# Altium PCB 检测板.PcbDoc
Units mm, origin at the board's own origin, x right, y up, seen from the top; angles counter-clockwise.
Board outline 189.99 x 7.15 mm, 2 copper layers (Top Layer, Bottom Layer); 32 components, 64 nets, 132 pads, 0 vias.
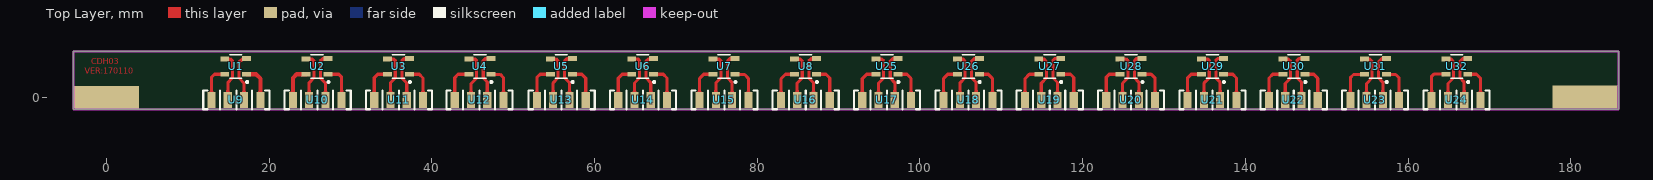
[diagram p0: Top Layer view]
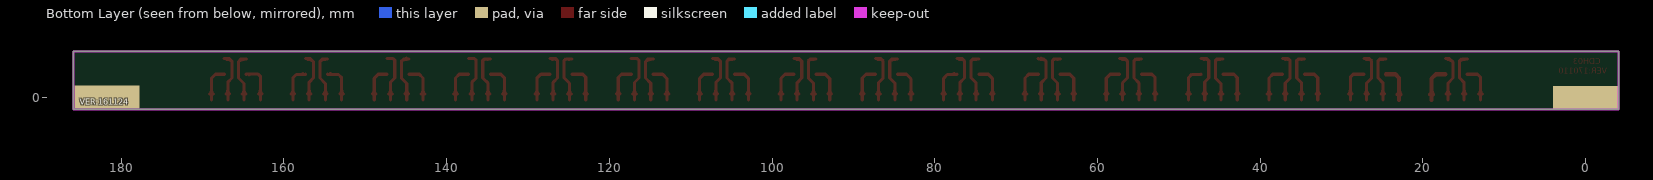
[diagram p1: Bottom Layer view, seen from below]

## Layer stack, top to bottom
Top Layer: signal copper 0.0356
Dielectric: dielectric 0.32, FR-4, Dk 4.8
Bottom Layer: signal copper 0.0356

## Board outline
-4.089,-1.473 185.896,-1.473 185.896,5.673 -4.089,5.673

## Design rules (kind name [scope] priority, off if disabled: settings)
Clearance [All] p1: gap=0.203
PolygonConnect [All] p1: connectstyle=Relief reliefconductorwidth=0.254 reliefentries=4 polygonreliefangle="90 Angle"
RoutingVias [All] p1: holewidth=0.711 width=1.27 viastyle="Through Hole" minholewidth=0.711 minwidth=1.27 maxholewidth=0.711 maxwidth=1.27
SilkscreenOverComponentPads [All] p1: minsilkscreentomaskgap=0.254
SolderMaskExpansion [All] p1: expansion=0.102
Width [All] p1: maxlimit=0.762 minlimit=0.254 preferedwidth=0.508
27 further rules are at their usual default settings.

## Components (designator, comment, footprint, x,y, rotation, side; value= is the part's Value field where it differs from the comment)
U1 "HW-101A" SOT-23-4 15.875,3.81 r270 top
U2 "HW-101A" SOT-23-4 25.883,3.81 r270 top
U3 "HW-101A" SOT-23-4 35.89,3.81 r270 top
U4 "HW-101A" SOT-23-4 45.898,3.81 r270 top
U5 "HW-101A" SOT-23-4 55.905,3.81 r270 top
U6 "HW-101A" SOT-23-4 65.913,3.81 r270 top
U7 "HW-101A" SOT-23-4 75.921,3.81 r270 top
U8 "HW-101A" SOT-23-4 85.928,3.81 r270 top
U9 "Header 4" PIN4 12.903,-0.305 r0 top
U10 "Header 4" PIN4 22.903,-0.305 r0 top
U11 "Header 4" PIN4 32.903,-0.305 r0 top
U12 "Header 4" PIN4 42.799,-0.305 r0 top
U13 "Header 4" PIN4 52.903,-0.305 r0 top
U14 "Header 4" PIN4 62.903,-0.305 r0 top
U15 "Header 4" PIN4 72.903,-0.305 r0 top
U16 "Header 4" PIN4 82.903,-0.305 r0 top
U17 "Header 4" PIN4 92.903,-0.305 r0 top
U18 "Header 4" PIN4 102.903,-0.305 r0 top
U19 "Header 4" PIN4 112.903,-0.305 r0 top
U20 "Header 4" PIN4 122.903,-0.305 r0 top
U21 "Header 4" PIN4 132.903,-0.305 r0 top
U22 "Header 4" PIN4 142.903,-0.305 r0 top
U23 "Header 4" PIN4 152.903,-0.305 r0 top
U24 "Header 4" PIN4 162.903,-0.305 r0 top
U25 "HW-101A" SOT-23-4 95.936,3.81 r270 top
U26 "HW-101A" SOT-23-4 105.943,3.81 r270 top
U27 "HW-101A" SOT-23-4 115.951,3.81 r270 top
U28 "HW-101A" SOT-23-4 125.959,3.81 r270 top
U29 "HW-101A" SOT-23-4 135.966,3.81 r270 top
U30 "HW-101A" SOT-23-4 145.974,3.81 r270 top
U31 "HW-101A" SOT-23-4 155.981,3.81 r270 top
U32 "HW-101A" SOT-23-4 165.989,3.81 r270 top

## Footprints (in the part's own frame and the unit in brackets; to place one, negate y for a bottom-side part, rotate by r counter-clockwise, add the part's x,y. Pads: shape width x height; smd on the part's side, far side on the other; paste and mask are expansions set on the pad)
PIN4 [mm]
  rect 1x2 smd: 1(0,0) 2(2,0) 3(4,0) 4(6,0)
  silkscreen extent -1.02,-1.14 7.11,1.14
SOT-23-4 [mm] "SOT143, 4-Leads, Body 2.9x2.9mm (max), Pitch 1.92mm"
  rect 0.6x1.1 smd: 1(0.96,1.35) 2(-0.96,1.35) 3(-0.94,-1.35) 4(0.96,-1.35)
  silkscreen extent -1.45,-0.75 2.03,1.52, body extent -1.45,-0.77 1.45,0.77, height 1.2

## Part data
U9 U10 U11 U12 U13 U14 U15 U16 U17 U18 U19 U20 U21 U22 U23 U24: "Header, 4-P"

## Free pads (board coordinates)
  rect 8x2.8 smd: 0(0,0) 0(181.777,0.04)
  rect 8x2.8 smd far side: 0(0,0) 0(181.777,0.04)

## Nets (pads, with @x,y where several pads share a name; then routed paths per layer and width w, separated by ;. In a path a pad name is that pad's centre, name@x,y a point inside that pad or via, vN(x,y) a via of type N, cw(c..) or ccw(c..) an arc to the next point about the centre after c; other vN are vias at no path point)
H1_IN1: U1.1 U9.4 | length 5.4
  Top Layer w0.508: U1.1 18.359,2.85 18.903,2.306 U9.4 ; U9.4@18.729,0.369 ccw(c18.309,0.789) 18.903,0.789 ccw(c19.497,0.789) U9.4@19.077,0.369
H1_IN3: U1.3 U9.2 | length 8
  Top Layer w0.381: U1.3 15.189,4.75 15.494,4.445 ; U9.2@14.684,0.414 ccw(c14.156,0.942) 14.903,0.942 ccw(c15.65,0.942) U9.2@15.122,0.414 ; U1.3@14.8,4.643 cw(c14.968,3.919) 15.494,4.445 ; U9.2 14.903,1.821 15.469,2.387 15.469,4.42 15.494,4.445
H1_OUT2: U1.2 U9.3 | length 7.9
  Top Layer w0.381: 16.332,4.394 cw(c16.975,3.752) U1.2@16.975,4.661 ; U9.3@16.684,0.414 ccw(c16.156,0.942) 16.903,0.942 ccw(c17.65,0.942) U9.3@17.122,0.414 ; U9.3 16.903,1.765 16.281,2.387 16.281,4.293 16.256,4.318 16.708,4.77 U1.2
H1_OUT4: U1.4 U9.1 | length 5.7
  Top Layer w0.381: U9.1@12.684,0.414 ccw(c12.156,0.942) 12.903,0.942 ccw(c13.65,0.942) U9.1@13.122,0.414 ; U9.1 12.903,2.489 13.264,2.85 U1.4
H2_IN1: U2.1 U10.4 | length 5.8
  Top Layer w0.381: U2.1 28.544,2.85 28.903,2.491 U10.4 ; U10.4@28.684,0.414 ccw(c28.156,0.942) 28.903,0.942 ccw(c29.65,0.942) U10.4@29.122,0.414
H2_IN3: U2.3 U10.2 | length 8
  Top Layer w0.381: U2.3 25.248,4.75 25.476,4.521 ; U10.2@24.684,0.414 ccw(c24.156,0.942) 24.903,0.942 ccw(c25.65,0.942) U10.2@25.122,0.414 ; U2.3@24.825,4.649 cw(c25.055,4.1) 25.476,4.521 ; U10.2 24.903,1.814 25.476,2.387 25.476,4.521
H2_OUT2: U2.2 U10.3 | length 8
  Top Layer w0.381: U10.3@26.684,0.414 ccw(c26.156,0.942) 26.903,0.942 ccw(c27.65,0.942) U10.3@27.122,0.414 ; U10.3 26.903,1.773 26.289,2.387 26.289,4.496 ; U2.2@26.952,4.665 ccw(c26.763,4.022) 26.289,4.496 ; U2.2 26.563,4.77 26.289,4.496
H2_OUT4: U2.4 U10.1 | length 5.4
  Top Layer w0.508: U10.1@22.729,0.369 ccw(c22.309,0.789) 22.903,0.789 ccw(c23.497,0.789) U10.1@23.077,0.369 ; U10.1 22.903,2.38 23.373,2.85 U2.4
H3_IN1: U3.1 U11.4 | length 5.7
  Top Layer w0.381: U3.1 38.45,2.85 38.903,2.397 U11.4 ; U11.4@38.684,0.414 ccw(c38.156,0.942) 38.903,0.942 ccw(c39.65,0.942) U11.4@39.122,0.414
H3_IN3: U3.3 U11.2 | length 8
  Top Layer w0.381: U3.3 35.281,4.75 35.484,4.546 ; U11.2@34.684,0.414 ccw(c34.156,0.942) 34.903,0.942 ccw(c35.65,0.942) U11.2@35.122,0.414 ; U3.3@34.839,4.652 cw(c35.088,4.151) 35.484,4.547 ; U11.2 34.903,1.806 35.484,2.387 35.484,4.546
H3_OUT2: U3.2 U11.3 | length 8
  Top Layer w0.381: U11.3@36.684,0.414 ccw(c36.156,0.942) 36.903,0.942 ccw(c37.65,0.942) U11.3@37.122,0.414 ; U11.3 36.903,1.78 36.296,2.387 36.296,4.521 ; U3.2@36.953,4.667 ccw(c36.739,4.078) 36.297,4.521 ; U3.2 36.545,4.77 36.296,4.521
H3_OUT4: U3.4 U11.1 | length 5.7
  Top Layer w0.381: U11.1@32.684,0.414 ccw(c32.156,0.942) 32.903,0.942 ccw(c33.65,0.942) U11.1@33.122,0.414 ; U11.1 32.903,2.423 33.33,2.85 U3.4
H4_IN1: U4.1 U12.4 | length 5.6
  Top Layer w0.381: U4.1 47.253,2.845 48.387,2.845 48.799,2.433 U12.4 ; U12.4@48.58,0.414 ccw(c48.052,0.942) 48.799,0.942 ccw(c49.546,0.942) U12.4@49.018,0.414
H4_IN3: U4.3 U12.2 | length 8
  Top Layer w0.381: U4.3 45.263,4.75 45.492,4.521 ; U12.2@44.58,0.414 ccw(c44.052,0.942) 44.799,0.942 ccw(c45.546,0.942) U12.2@45.018,0.414 ; U12.2 44.799,1.694 45.492,2.387 45.492,4.521 ; U4.3@44.84,4.649 cw(c45.071,4.1) 45.491,4.521
H4_OUT2: U4.2 U12.3 | length 8
  Top Layer w0.381: U12.3@46.58,0.414 ccw(c46.052,0.942) 46.799,0.942 ccw(c47.546,0.942) U12.3@47.018,0.414 ; U12.3 46.799,1.892 46.304,2.387 46.304,4.521 ; U4.2@46.96,4.667 ccw(c46.747,4.078) 46.304,4.521 ; U4.2 46.553,4.77 46.304,4.521
H4_OUT4: U4.4 U12.1 | length 5.8
  Top Layer w0.381: U12.1@42.58,0.414 ccw(c42.052,0.942) 42.799,0.942 ccw(c43.546,0.942) U12.1@43.018,0.414 ; U12.1 42.799,2.438 43.211,2.85 U4.4
H5_IN1: U5.1 U13.4 | length 5.7
  Top Layer w0.381: U5.1 58.415,2.85 58.903,2.362 U13.4 ; U13.4@58.684,0.414 ccw(c58.156,0.942) 58.903,0.942 ccw(c59.65,0.942) U13.4@59.122,0.414
H5_IN3: U5.3 U13.2 | length 8
  Top Layer w0.381: U5.3 55.27,4.75 55.499,4.521 ; U13.2@54.684,0.414 ccw(c54.156,0.942) 54.903,0.942 ccw(c55.65,0.942) U13.2@55.122,0.414 ; U5.3@54.848,4.649 cw(c55.078,4.1) 55.499,4.521 ; U13.2 54.903,1.791 55.499,2.387 55.499,4.521
H5_OUT2: U5.2 U13.3 | length 8
  Top Layer w0.381: U13.3@56.684,0.414 ccw(c56.156,0.942) 56.903,0.942 ccw(c57.65,0.942) U13.3@57.122,0.414 ; U13.3 56.903,1.795 56.312,2.387 56.312,4.496 ; U5.2@56.975,4.665 ccw(c56.786,4.022) 56.312,4.496 ; U5.2 56.586,4.77 56.312,4.496
H5_OUT4: U5.4 U13.1 | length 5.8
  Top Layer w0.381: U13.1@52.684,0.414 ccw(c52.156,0.942) 52.903,0.942 ccw(c53.65,0.942) U13.1@53.122,0.414 ; U13.1 52.903,2.459 53.294,2.85 U5.4
H6_IN1: U6.1 U14.4 | length 5.7
  Top Layer w0.381: U6.1 68.448,2.85 68.903,2.395 U14.4 ; U14.4@68.684,0.414 ccw(c68.156,0.942) 68.903,0.942 ccw(c69.65,0.942) U14.4@69.122,0.414
H6_IN3: U6.3 U14.2 | length 8
  Top Layer w0.381: U6.3 65.303,4.75 65.507,4.546 ; U14.2@64.684,0.414 ccw(c64.156,0.942) 64.903,0.942 ccw(c65.65,0.942) U14.2@65.122,0.414 ; U6.3@64.862,4.652 cw(c65.111,4.151) 65.507,4.547 ; U14.2 64.903,1.783 65.507,2.387 65.507,4.546
H6_OUT2: U6.2 U14.3 | length 8.3
  Top Layer w0.381: 66.639,4.724 ccw(c66.639,5.144) U6.2@66.936,4.847 ; U14.3@66.684,0.414 ccw(c66.156,0.942) 66.903,0.942 ccw(c67.65,0.942) U14.3@67.122,0.414 ; U14.3 66.903,1.803 66.319,2.387 66.319,4.47 ; U6.2@66.989,4.663 ccw(c66.829,3.961) 66.319,4.47 ; U6.2 67.217,4.724 66.573,4.724 66.319,4.47
H6_OUT4: U6.4 U14.1 | length 5.7
  Top Layer w0.381: U14.1@62.684,0.414 ccw(c62.156,0.942) 62.903,0.942 ccw(c63.65,0.942) U14.1@63.122,0.414 ; U14.1 62.903,2.375 63.378,2.85 U6.4
H7_IN1: U7.1 U15.4 | length 6
  Top Layer w0.381: U7.1 77.301,2.819 78.435,2.819 78.903,2.351 U15.4 ; U7.1@77.598,2.927 ccw(c77.859,3.188) 77.859,2.819 ; U15.4@78.684,0.414 ccw(c78.156,0.942) 78.903,0.942 ccw(c79.65,0.942) U15.4@79.122,0.414
H7_IN3: U7.3 U15.2 | length 8
  Top Layer w0.381: U7.3 75.285,4.75 75.514,4.521 ; U15.2@74.684,0.414 ccw(c74.156,0.942) 74.903,0.942 ccw(c75.65,0.942) U15.2@75.122,0.414 ; U7.3@74.863,4.649 cw(c75.093,4.1) 75.514,4.521 ; U15.2 74.903,1.776 75.514,2.387 75.514,4.521
H7_OUT2: U7.2 U15.3 | length 8
  Top Layer w0.381: U15.3@76.684,0.414 ccw(c76.156,0.942) 76.903,0.942 ccw(c77.65,0.942) U15.3@77.122,0.414 ; U15.3 76.903,1.811 76.327,2.387 76.327,4.496 ; U7.2@76.99,4.665 ccw(c76.801,4.022) 76.327,4.496 ; U7.2 76.601,4.77 76.327,4.496
H7_OUT4: U7.4 U15.1 | length 5.7
  Top Layer w0.381: U15.1@72.684,0.414 ccw(c72.156,0.942) 72.903,0.942 ccw(c73.65,0.942) U15.1@73.122,0.414 ; U15.1 72.903,2.342 73.411,2.85 U7.4
H8_IN1: U8.1 U16.4 | length 5.7
  Top Layer w0.381: U8.1 88.438,2.85 88.903,2.384 U16.4 ; U16.4@88.684,0.414 ccw(c88.156,0.942) 88.903,0.942 ccw(c89.65,0.942) U16.4@89.122,0.414
H8_IN3: U8.3 U16.2 | length 8
  Top Layer w0.381: U8.3 85.217,4.75 85.522,4.445 ; U16.2@84.684,0.414 ccw(c84.156,0.942) 84.903,0.942 ccw(c85.65,0.942) U16.2@85.122,0.414 ; U8.3@84.851,4.643 cw(c85.005,3.928) 85.522,4.445 ; U16.2 84.903,1.768 85.522,2.387 85.522,4.445
H8_OUT2: U8.2 U16.3 | length 8
  Top Layer w0.381: U16.3@86.684,0.414 ccw(c86.156,0.942) 86.903,0.942 ccw(c87.65,0.942) U16.3@87.122,0.414 ; U16.3 86.903,1.818 86.334,2.387 86.334,4.496 ; U8.2@86.997,4.665 ccw(c86.809,4.022) 86.335,4.496 ; U8.2 86.609,4.77 86.334,4.496
H8_OUT4: U8.4 U16.1 | length 5.7
  Top Layer w0.381: U16.1@82.684,0.414 ccw(c82.156,0.942) 82.903,0.942 ccw(c83.65,0.942) U16.1@83.122,0.414 ; U16.1 82.903,2.284 83.47,2.85 U8.4
H9_IN1: U17.4 U25.1 | length 5.6
  Top Layer w0.381: U25.1 98.394,2.85 98.903,2.341 U17.4 ; U17.4@98.684,0.414 ccw(c98.156,0.942) 98.903,0.942 ccw(c99.65,0.942) U17.4@99.122,0.414
H9_IN3: U17.2 U25.3 | length 8
  Top Layer w0.381: U25.3 95.275,4.75 95.53,4.496 ; U17.2@94.684,0.414 ccw(c94.156,0.942) 94.903,0.942 ccw(c95.65,0.942) U17.2@95.122,0.414 ; U25.3@94.872,4.647 cw(c95.08,4.047) 95.529,4.496 ; U17.2 94.903,1.761 95.53,2.387 95.53,4.496
H9_OUT2: U17.3 U25.2 | length 8
  Top Layer w0.381: U17.3@96.684,0.414 ccw(c96.156,0.942) 96.903,0.942 ccw(c97.65,0.942) U17.3@97.122,0.414 ; U17.3 96.903,1.826 96.342,2.387 96.342,4.47 ; U25.2@97.011,4.663 ccw(c96.851,3.961) 96.342,4.47 ; U25.2 96.642,4.77 96.342,4.47
H9_OUT4: U17.1 U25.4 | length 5.7
  Top Layer w0.381: U17.1@92.684,0.414 ccw(c92.156,0.942) 92.903,0.942 ccw(c93.65,0.942) U17.1@93.122,0.414 ; U17.1 92.903,2.301 93.452,2.85 U25.4
H10_IN1: U18.4 U26.1 | length 5.6
  Top Layer w0.381: U26.1 108.402,2.85 108.903,2.349 U18.4 ; U18.4@108.684,0.414 ccw(c108.156,0.942) 108.903,0.942 ccw(c109.65,0.942) U18.4@109.122,0.414
H10_IN3: U18.2 U26.3 | length 8
  Top Layer w0.381: U26.3 105.257,4.75 105.537,4.47 ; U18.2@104.684,0.414 ccw(c104.156,0.942) 104.903,0.942 ccw(c105.65,0.942) U18.2@105.122,0.414 ; U26.3@104.873,4.645 cw(c105.056,3.989) 105.537,4.47 ; U18.2 104.903,1.753 105.537,2.387 105.537,4.47
H10_OUT2: U18.3 U26.2 | length 8
  Top Layer w0.381: U18.3@106.684,0.414 ccw(c106.156,0.942) 106.903,0.942 ccw(c107.65,0.942) U18.3@107.122,0.414 ; U18.3 106.903,1.833 106.35,2.387 106.35,4.47 ; U26.2@107.019,4.663 ccw(c106.859,3.961) 106.35,4.47 ; U26.2 106.649,4.77 106.35,4.47
H10_OUT4: U18.1 U26.4 | length 5.7
  Top Layer w0.381: U18.1@102.684,0.414 ccw(c102.156,0.942) 102.903,0.942 ccw(c103.65,0.942) U18.1@103.122,0.414 ; U18.1 102.903,2.345 103.409,2.85 U26.4
H11_IN1: U19.4 U27.1 | length 5.7
  Top Layer w0.381: U27.1 118.511,2.85 118.903,2.458 U19.4 ; U19.4@118.684,0.414 ccw(c118.156,0.942) 118.903,0.942 ccw(c119.65,0.942) U19.4@119.122,0.414
H11_IN3: U19.2 U27.3 | length 8
  Top Layer w0.381: U27.3 115.214,4.75 115.545,4.419 ; U19.2@114.684,0.414 ccw(c114.156,0.942) 114.903,0.942 ccw(c115.65,0.942) U19.2@115.122,0.414 ; U27.3@114.867,4.642 cw(c114.986,3.861) 115.545,4.42 ; U19.2 114.903,1.745 115.545,2.387 115.545,4.419
H11_OUT2: U19.3 U27.2 | length 7.3
  Top Layer w0.381: U19.3@116.684,0.414 ccw(c116.156,0.942) 116.903,0.942 ccw(c117.65,0.942) U19.3@117.122,0.414 ; U19.3 116.903,1.841 116.357,2.387 116.357,4.572 116.555,4.77 U27.2
H11_OUT4: U19.1 U27.4 | length 5.7
  Top Layer w0.381: U19.1@112.684,0.414 ccw(c112.156,0.942) 112.903,0.942 ccw(c113.65,0.942) U19.1@113.122,0.414 ; U19.1 112.903,2.312 113.442,2.85 U27.4
H12_IN1: U20.4 U28.1 | length 5.6
  Top Layer w0.381: U28.1 128.417,2.85 128.903,2.364 U20.4 ; U20.4@128.684,0.414 ccw(c128.156,0.942) 128.903,0.942 ccw(c129.65,0.942) U20.4@129.122,0.414
H12_IN3: U20.2 U28.3 | length 8
  Top Layer w0.381: U28.3 125.349,4.75 125.552,4.546 ; U20.2@124.684,0.414 ccw(c124.156,0.942) 124.903,0.942 ccw(c125.65,0.942) U20.2@125.122,0.414 ; U20.2 124.903,1.738 125.552,2.387 125.552,4.546 ; U28.3@124.907,4.652 cw(c125.156,4.151) 125.552,4.547
H12_OUT2: U20.3 U28.2 | length 8
  Top Layer w0.381: U20.3@126.684,0.414 ccw(c126.156,0.942) 126.903,0.942 ccw(c127.65,0.942) U20.3@127.122,0.414 ; U20.3 126.903,1.849 126.365,2.387 126.365,4.546 ; U28.2@127.015,4.67 ccw(c126.78,4.131) 126.365,4.547 ; U28.2 126.588,4.77 126.365,4.546
H12_OUT4: U20.1 U28.4 | length 5.8
  Top Layer w0.381: U20.1@122.684,0.414 ccw(c122.156,0.942) 122.903,0.942 ccw(c123.65,0.942) U20.1@123.122,0.414 ; U20.1 122.903,2.482 123.271,2.85 U28.4
H13_IN1: U21.4 U29.1 | length 5.7
  Top Layer w0.381: U29.1 138.45,2.85 138.903,2.397 U21.4 ; U21.4@138.684,0.414 ccw(c138.156,0.942) 138.903,0.942 ccw(c139.65,0.942) U21.4@139.122,0.414
H13_IN3: U21.2 U29.3 | length 8
  Top Layer w0.381: U29.3 135.357,4.75 135.56,4.546 ; U21.2@134.684,0.414 ccw(c134.156,0.942) 134.903,0.942 ccw(c135.65,0.942) U21.2@135.122,0.414 ; U21.2 134.903,1.73 135.56,2.387 135.56,4.546 ; U29.3@134.915,4.652 cw(c135.164,4.151) 135.56,4.547
H13_OUT2: U21.3 U29.2 | length 7.3
  Top Layer w0.381: U21.3@136.684,0.414 ccw(c136.156,0.942) 136.903,0.942 ccw(c137.65,0.942) U21.3@137.122,0.414 ; U21.3 136.903,1.856 136.372,2.387 136.372,4.572 136.571,4.77 U29.2
H13_OUT4: U21.1 U29.4 | length 5.8
  Top Layer w0.381: U21.1@132.684,0.414 ccw(c132.156,0.942) 132.903,0.942 ccw(c133.65,0.942) U21.1@133.122,0.414 ; U21.1 132.903,2.423 133.33,2.85 U29.4
H14_IN1: U22.4 U30.1 | length 5.6
  Top Layer w0.381: U30.1 148.407,2.85 148.903,2.354 U22.4 ; U22.4@148.684,0.414 ccw(c148.156,0.942) 148.903,0.942 ccw(c149.65,0.942) U22.4@149.122,0.414
H14_IN3: U22.2 U30.3 | length 8.3
  Top Layer w0.381: U30.3 144.649,4.724 145.288,4.724 145.568,4.445 ; U22.2@144.684,0.414 ccw(c144.156,0.942) 144.903,0.942 ccw(c145.65,0.942) U22.2@145.122,0.414 ; U30.3@144.897,4.643 cw(c145.05,3.928) 145.567,4.445 ; U22.2 144.903,1.723 145.568,2.387 145.568,4.445 ; U30.3@144.951,4.827 ccw(c145.2,5.076) 145.2,4.724
H14_OUT2: U22.3 U30.2 | length 7.3
  Top Layer w0.381: U22.3@146.684,0.414 ccw(c146.156,0.942) 146.903,0.942 ccw(c147.65,0.942) U22.3@147.122,0.414 ; U22.3 146.903,1.864 146.38,2.387 146.38,4.572 146.578,4.77 U30.2
H14_OUT4: U22.1 U30.4 | length 5.8
  Top Layer w0.381: U22.1@142.684,0.414 ccw(c142.156,0.942) 142.903,0.942 ccw(c143.65,0.942) U22.1@143.122,0.414 ; U22.1 142.903,2.39 143.363,2.85 U30.4
H15_IN1: U23.4 U31.1 | length 5.9
  Top Layer w0.381: U31.1 157.362,2.819 158.471,2.819 158.903,2.387 U23.4 ; U31.1@157.659,2.927 ccw(c157.92,3.188) 157.92,2.819 ; U23.4@158.684,0.414 ccw(c158.156,0.942) 158.903,0.942 ccw(c159.65,0.942) U23.4@159.122,0.414
H15_IN3: U23.2 U31.3 | length 8
  Top Layer w0.381: U31.3 155.27,4.75 155.575,4.445 ; U23.2@154.684,0.414 ccw(c154.156,0.942) 154.903,0.942 ccw(c155.65,0.942) U23.2@155.122,0.414 ; U23.2 154.903,1.715 155.575,2.387 155.575,4.445 ; U31.3@154.904,4.643 cw(c155.058,3.928) 155.575,4.445
H15_OUT2: U23.3 U31.2 | length 7.9
  Top Layer w0.381: U23.3@156.684,0.414 ccw(c156.156,0.942) 156.903,0.942 ccw(c157.65,0.942) U23.3@157.122,0.414 ; U23.3 156.903,1.871 156.388,2.387 156.388,4.419 ; U31.2@157.07,4.661 ccw(c156.982,3.825) 156.388,4.42 ; U31.2 156.738,4.77 156.388,4.419
H15_OUT4: U23.1 U31.4 | length 6.1
  Top Layer w0.381: U23.1@152.684,0.414 ccw(c152.156,0.942) 152.903,0.942 ccw(c153.65,0.942) U23.1@153.122,0.414 ; U23.1 152.903,2.434 153.289,2.819 154.601,2.819 U31.4 ; 154.043,2.819 ccw(c154.043,3.188) U31.4@154.304,2.927
H16_IN1: U24.4 U32.1 | length 5.6
  Top Layer w0.381: U32.1 168.422,2.85 168.903,2.369 U24.4 ; U24.4@168.684,0.414 ccw(c168.156,0.942) 168.903,0.942 ccw(c169.65,0.942) U24.4@169.122,0.414
H16_IN3: U24.2 U32.3 | length 8
  Top Layer w0.381: U32.3 165.252,4.75 165.583,4.419 ; U24.2@164.684,0.414 ccw(c164.156,0.942) 164.903,0.942 ccw(c165.65,0.942) U24.2@165.122,0.414 ; U24.2 164.903,1.707 165.583,2.387 165.583,4.419 ; U32.3@164.905,4.642 cw(c165.024,3.861) 165.583,4.42
H16_OUT2: U24.3 U32.2 | length 7.9
  Top Layer w0.381: U24.3@166.684,0.414 ccw(c166.156,0.942) 166.903,0.942 ccw(c167.65,0.942) U24.3@167.122,0.414 ; U24.3 166.903,1.879 166.395,2.387 166.395,4.445 ; U32.2@167.071,4.662 ccw(c166.944,3.896) 166.395,4.445 ; U32.2 166.72,4.77 166.395,4.445
H16_OUT4: U24.1 U32.4 | length 6.2
  Top Layer w0.381: U24.1@162.684,0.414 ccw(c162.156,0.942) 162.903,0.942 ccw(c163.65,0.942) U24.1@163.122,0.414 ; U24.1 162.903,2.604 163.17,2.87 164.619,2.87 U32.4 ; 164.076,2.87 cw(c164.076,2.537) U32.4@164.312,2.773
copper on no net: | length 0.1
  Top Layer w0.254: 28.903,-0.305 28.941,-0.267

## Keep-outs
Keep-Out Layer:
  the board outline again, w0.254

## Other copper
Top Layer:
  text "CDH03" at -1.905,4.064 h0.7
  text "VER:170110" at -2.667,2.921 h0.7

## Silkscreen, mask and mechanical layers (free items; w line width, h text height)
Bottom Overlay:
  text "VER:161124" at 185.104,-0.925 h0.7